# EAGLE board ME461_F28379DPicture (EAGLE 7.7.0), part 1 of 3
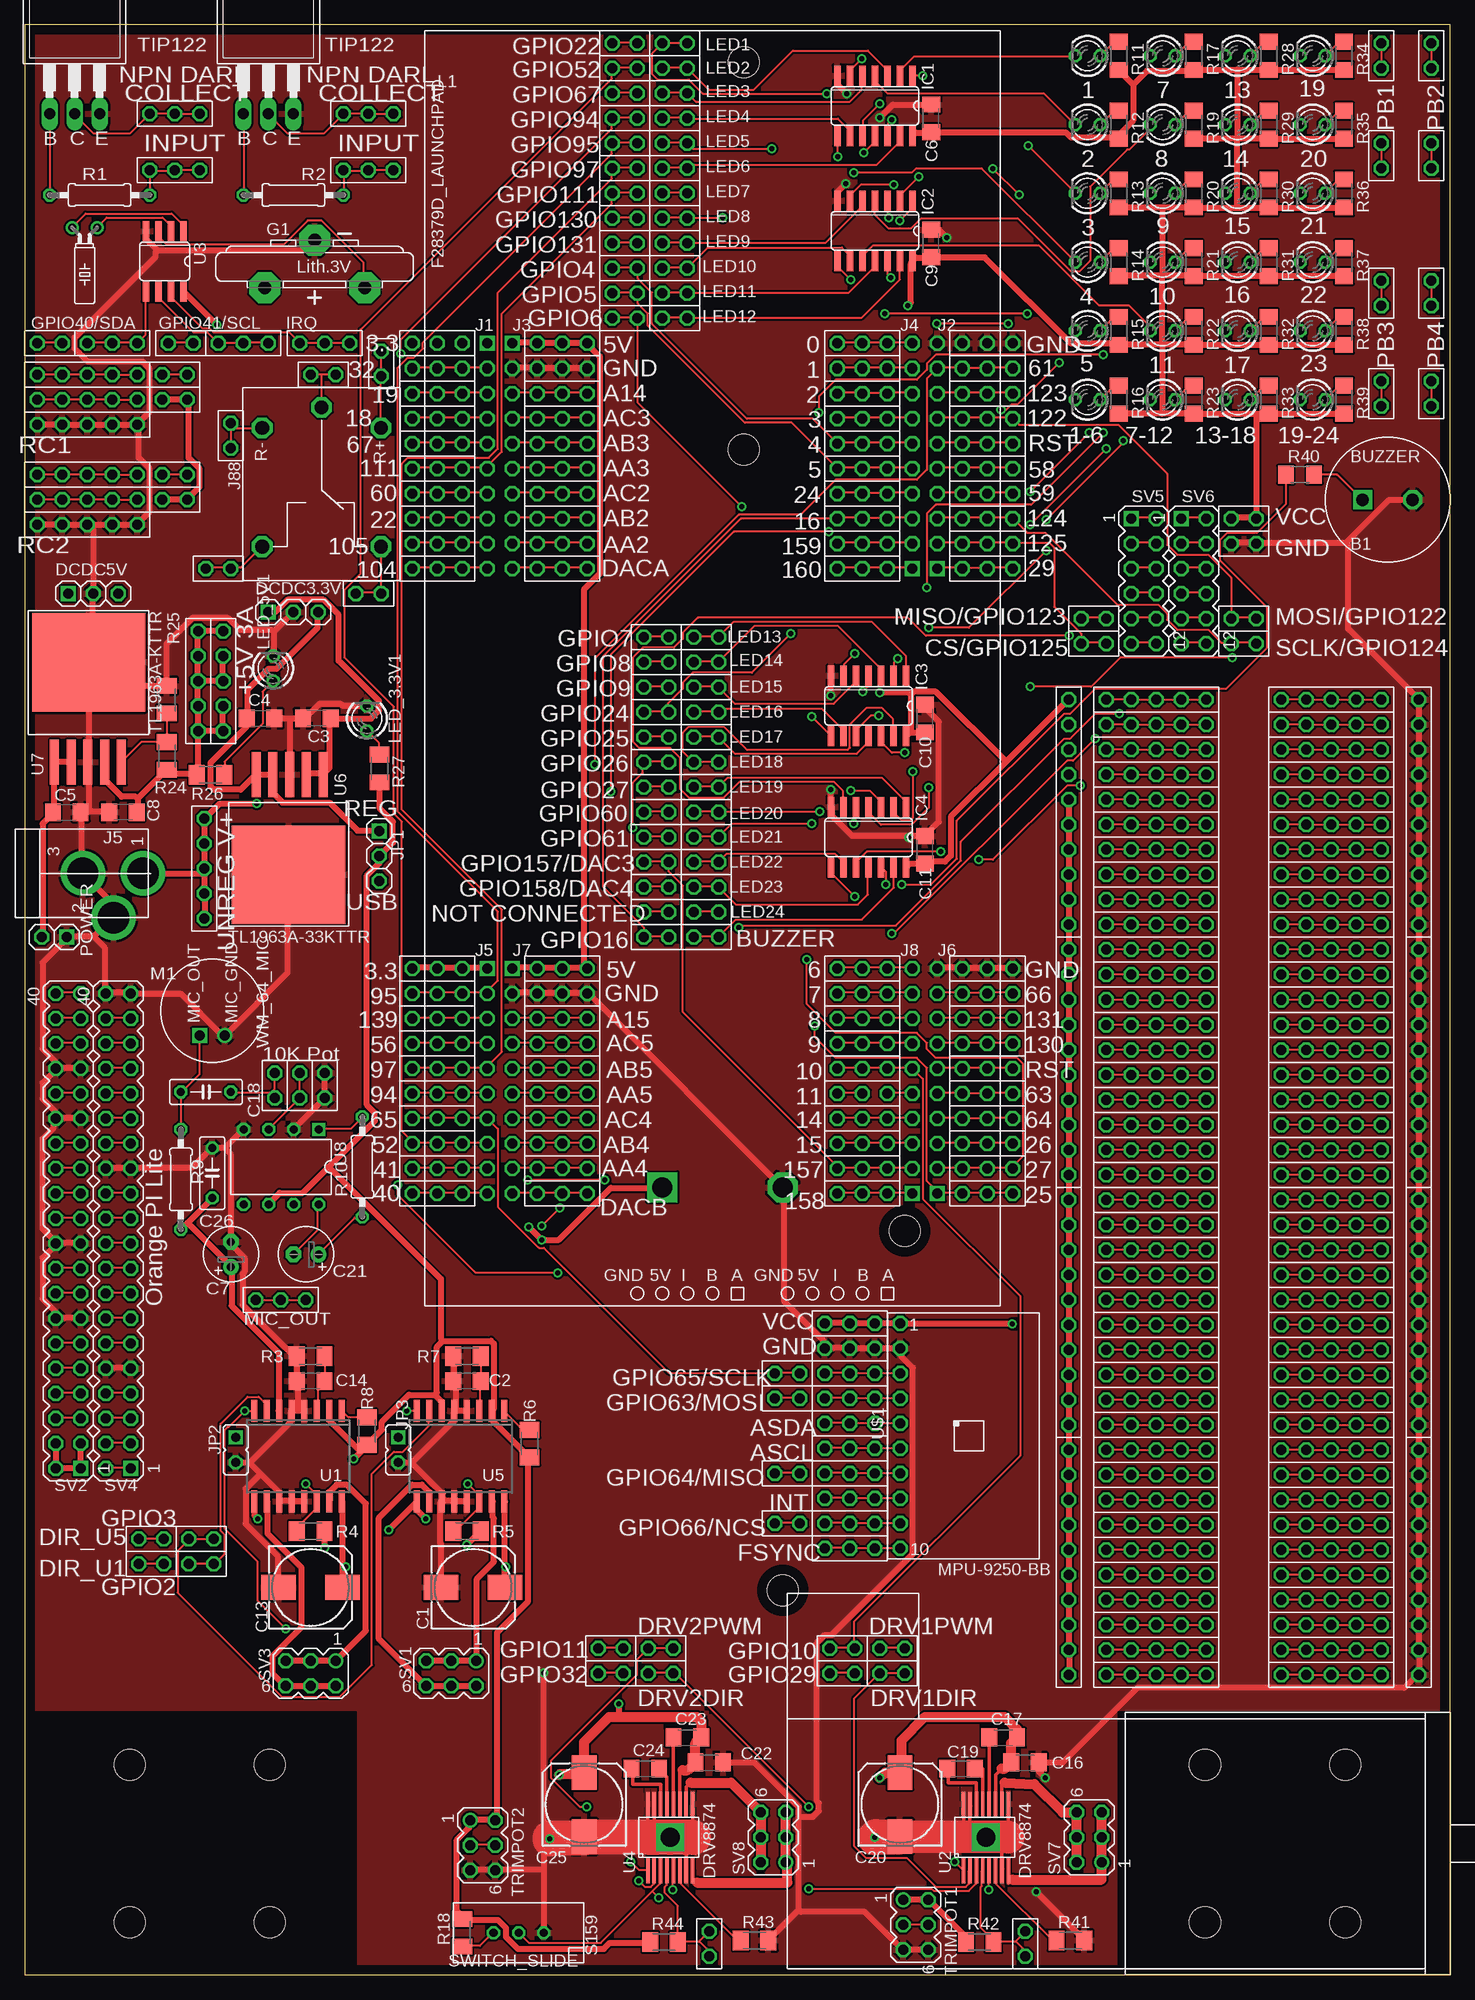
[diagram p0: board, top side]
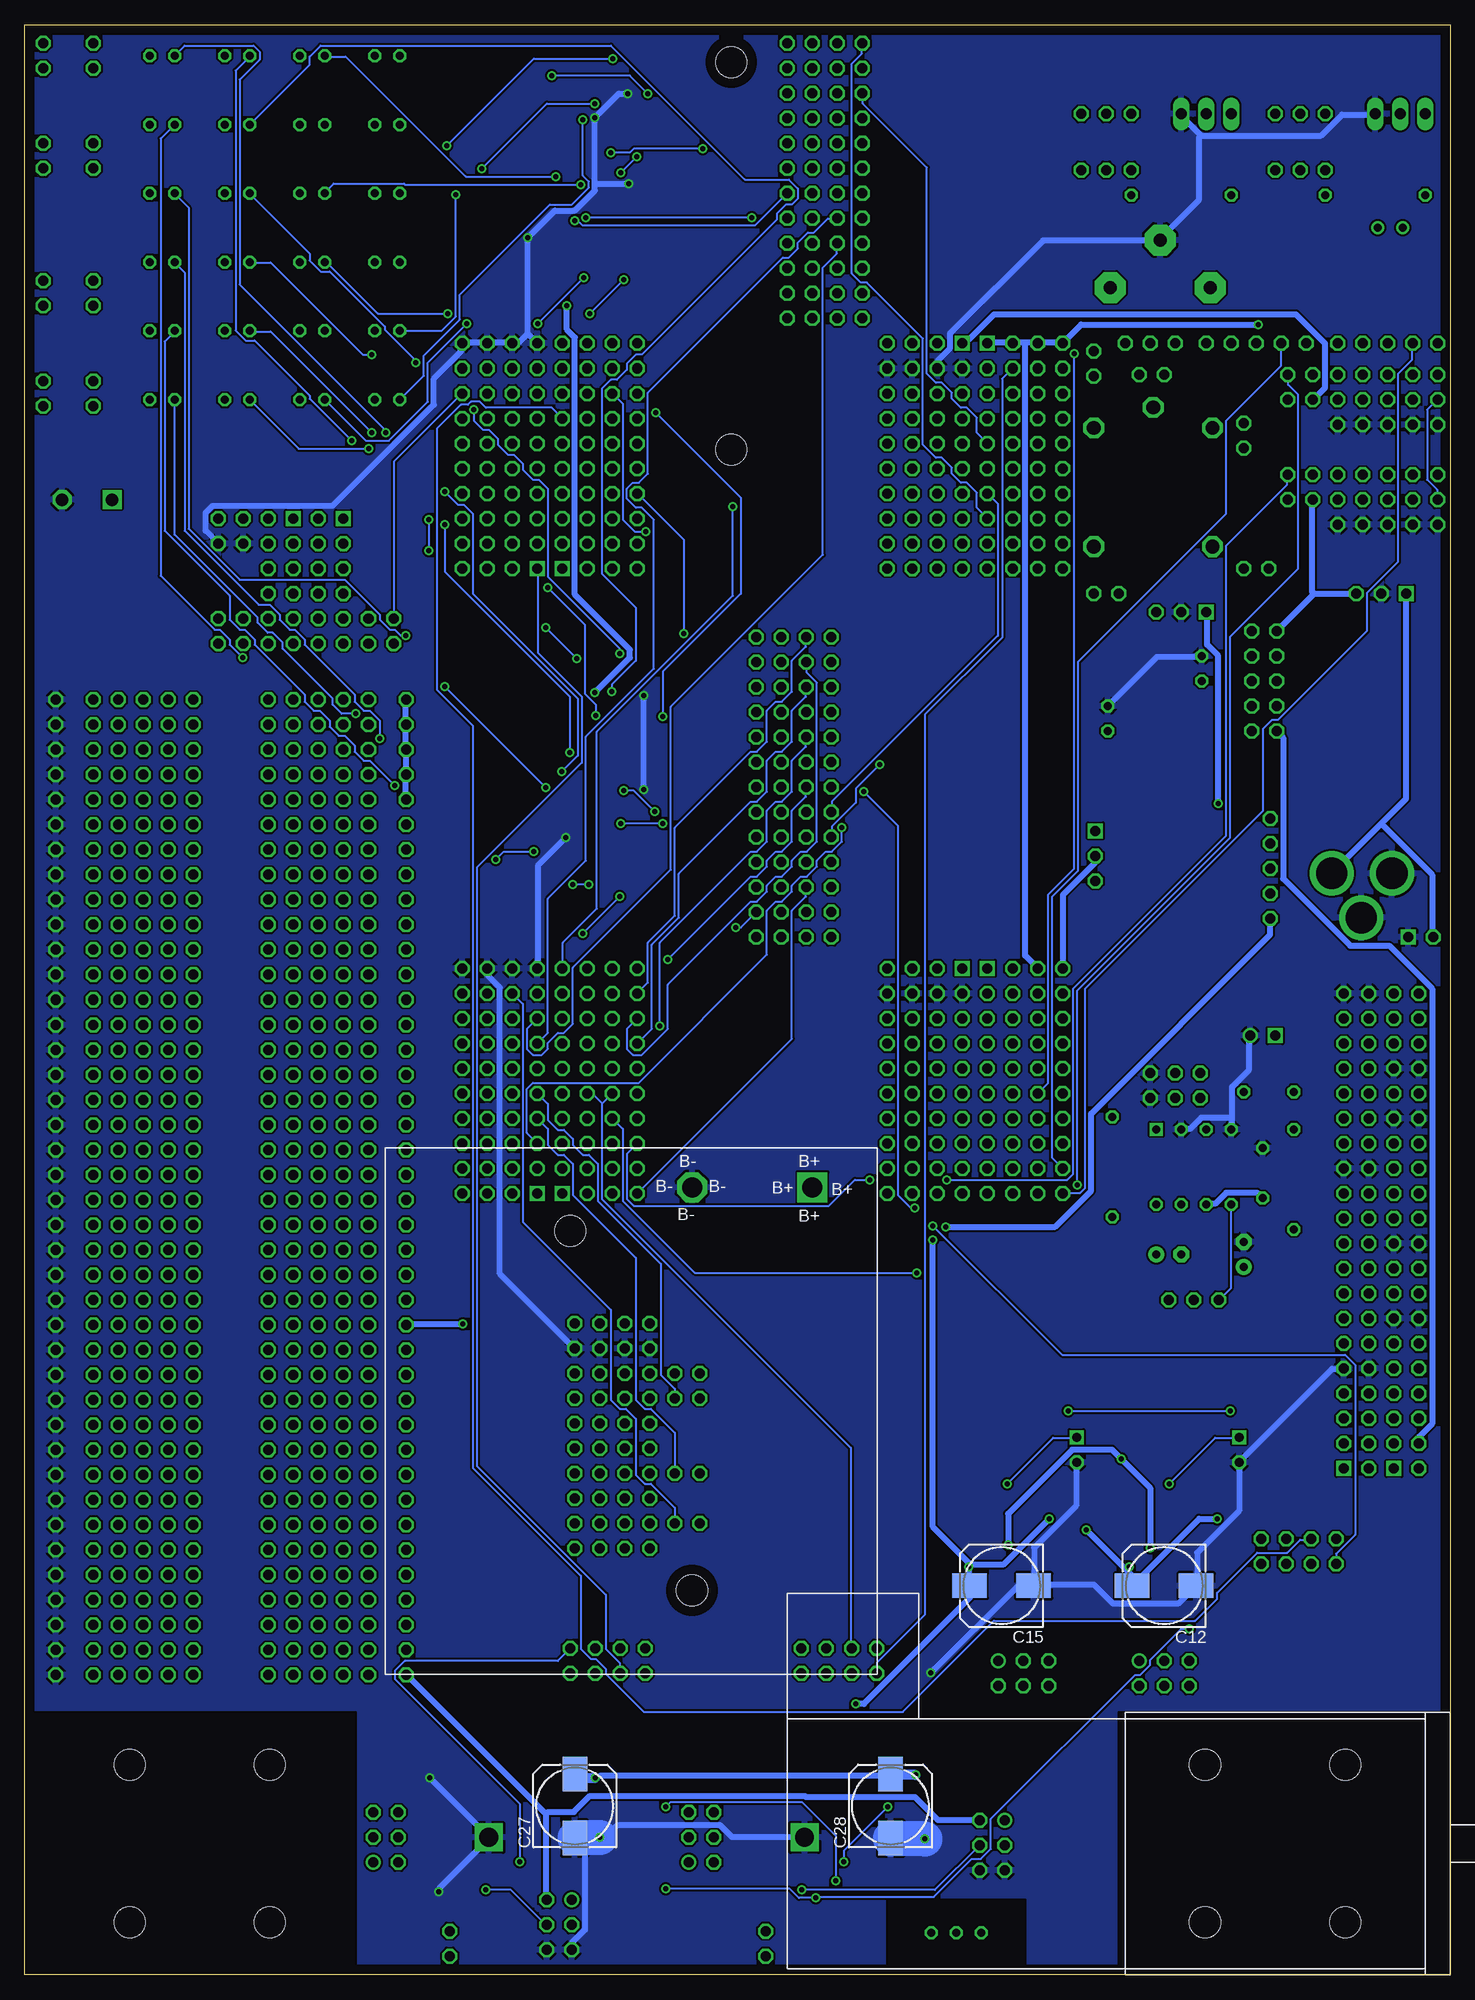
[diagram p1: board, bottom side, seen from below]

Size 144.78 x 198.12 mm. Coordinates in mm from the lower left corner, seen from the top.
Outline: 0,0 144.78,0 144.78,198.12 0,198.12 0,0
Copper layers (1*16): Top 0.035mm / dielectric 1.5mm / Bottom 0.035mm
Design rules "default *": minimum track width 7mil, minimum drill 20mil, track to track 8mil, track to pad 8mil, pad to pad 8mil, via to via 8mil, smd to smd 8mil, copper to edge 40mil, drill to drill 8mil, minimum pad ring 10mil, minimum via ring 8mil, stop-mask expansion 4mil, vias tented up to drill 20mil, thermal gap 10mil
Net classes: 0 default: width 0.203 mm, drill 0.508 mm, clearance 0.203 mm; 1 supply: width 0.61 mm, drill 0.508 mm, clearance 0.203 mm
tRestrict: area 0,0 to 33.7,26.7; area 111.1,0 to 144.8,26.7
bRestrict: area 43.2,0 to 57.1,7.6; area 111.1,0 to 144.8,26.7; area 0,0 to 33.7,26.7

## Footprints (pad centres in the part's own frame; a part is rotated, then mirrored left to right if it is on the bottom)
BUZZER = drill 1.27 square: P$1 -2.54,0 | drill 1.27 octagon: P$2 2.54,0
BATTERY_4AA_HOLDER = drill 2.032 square: P$1 0,0 | drill 2.032 octagon: P$2 12.224,0 | hole 3.175: 12.224,40.958; 24.606,4.445
153CLV-0810 = smd 3.5 x 2.5: + 3.25,0; - -3.25,0
C1206 = smd 1.6 x 1.8: 1 -1.4,0; 2 1.4,0
E2,5-6 = drill 0.813 pad 1.6: + -1.27,0 | drill 0.813 pad 1.6 octagon: - 1.27,0
C050-025X075 = drill 0.813 octagon: 1 -2.54,0; 2 2.54,0
1X03 = drill 1.016 square: 1 -2.54,0 | drill 1.016 octagon: 2 0,0; 3 2.54,0
CR2032V = drill 1.321 pad 3.15 octagon: + -2.54,-5.08; +@1 -2.54,5.08; - 2.286,0
SO14 = smd 0.66 x 2.032: 1 -3.81,-3.073; 2 -2.54,-3.073; 3 -1.27,-3.073; 4 0,-3.073; 5 1.27,-3.073; 6 2.54,-3.073; 7 3.81,-3.073; 8 3.81,3.073; 9 2.54,3.073; 10 1.27,3.073; 11 0,3.073; 12 -1.27,3.073; 13 -2.54,3.073; 14 -3.81,3.073
STRIP3 = drill 1.016 octagon: P$1 0,0; P$2 2.54,0; P$3 5.08,0
JACK-PMS = drill 3.175 pad 4.5: 1 -0.5,-3.31; 2 -5,-0.31; 3 -0.5,2.809
STRIP2 = drill 1.016 octagon: P$1 0,0; P$2 2.54,0
RELAY_JQC-3F_5V = drill 1.397 octagon: P$1 0,0; P$2 2.064,6.032; P$3 14.129,6.032; P$4 14.129,-6.032; P$5 2.064,-6.032
JP1 = drill 0.914 square: 1 0,-1.27 | drill 0.914 octagon: 2 0,1.27
F28379D_LAUNCHPAD = drill 1.016 square: P$1 -24.13,33.02; P$11 21.59,10.16; P$21 -21.59,33.02; P$31 19.05,10.16; P$41 -24.13,-30.48; P$51 21.59,-53.34; P$61 -21.59,-30.48; P$71 19.05,-53.34 | drill 1.016 octagon: P$2 -24.13,30.48; P$3 -24.13,27.94; P$4 -24.13,25.4; P$5 -24.13,22.86; P$6 -24.13,20.32; P$7 -24.13,17.78; P$8 -24.13,15.24; P$9 -24.13,12.7; P$10 -24.13,10.16; P$12 21.59,12.7; P$13 21.59,15.24; P$14 21.59,17.78; P$15 21.59,20.32; P$16 21.59,22.86; P$17 21.59,25.4; P$18 21.59,27.94; P$19 21.59,30.48; P$20 21.59,33.02; P$22 -21.59,30.48; P$23 -21.59,27.94; P$24 -21.59,25.4; P$25 -21.59,22.86; P$26 -21.59,20.32; P$27 -21.59,17.78; P$28 -21.59,15.24; P$29 -21.59,12.7; P$30 -21.59,10.16; P$32 19.05,12.7; P$33 19.05,15.24; P$34 19.05,17.78; P$35 19.05,20.32; P$36 19.05,22.86; P$37 19.05,25.4; P$38 19.05,27.94; P$39 19.05,30.48; P$40 19.05,33.02; P$42 -24.13,-33.02; P$43 -24.13,-35.56; P$44 -24.13,-38.1; P$45 -24.13,-40.64; P$46 -24.13,-43.18; P$47 -24.13,-45.72; P$48 -24.13,-48.26; P$49 -24.13,-50.8; P$50 -24.13,-53.34; P$52 21.59,-50.8; P$53 21.59,-48.26; P$54 21.59,-45.72; P$55 21.59,-43.18; P$56 21.59,-40.64; P$57 21.59,-38.1; P$58 21.59,-35.56; P$59 21.59,-33.02; P$60 21.59,-30.48; P$62 -21.59,-33.02; P$63 -21.59,-35.56; P$64 -21.59,-38.1; P$65 -21.59,-40.64; P$66 -21.59,-43.18; P$67 -21.59,-45.72; P$68 -21.59,-48.26; P$69 -21.59,-50.8; P$70 -21.59,-53.34; P$72 19.05,-50.8; P$73 19.05,-48.26; P$74 19.05,-45.72; P$75 19.05,-43.18; P$76 19.05,-40.64; P$77 19.05,-38.1; P$78 19.05,-35.56; P$79 19.05,-33.02; P$80 19.05,-30.48
LED3MM = drill 0.813 octagon: A -1.27,0; K 1.27,0
WM_64_MIC = drill 1.016 square: P$1 0,0 | drill 1.016: P$2 2.54,0
1X02 = drill 1.016 square: 1 -1.27,0 | drill 1.016 octagon: 2 1.27,0
TC26H = drill 0.813: 1 -1.27,0; 2 1.27,0
0207/10 = drill 0.813 octagon: 1 -5.08,0; 2 5.08,0
M1206 = smd 1.6 x 2: 1 -1.4,0; 2 1.4,0
R1206 = smd 1.6 x 1.803: 1 -1.422,0; 2 1.422,0
STRIP5 = drill 1.016 octagon: P$1 0,0; P$2 2.54,0; P$3 5.08,0; P$4 7.62,0; P$5 10.16,0
STRIP10 = drill 1.016 octagon: P$1 0,0; P$2 2.54,0; P$3 5.08,0; P$4 7.62,0; P$5 10.16,0; P$6 12.7,0; P$7 15.24,0; P$8 17.78,0; P$9 20.32,0; P$10 22.86,0
SWITCH_SLIDE = drill 0.813 octagon: P$1 0,-5.08; P$2 0,-2.54; P$3 0,0
MA03-2 = drill 1.016: 1 -2.54,-1.27 | drill 1.016 octagon: 2 -2.54,1.27; 3 0,-1.27; 4 0,1.27; 5 2.54,-1.27; 6 2.54,1.27
MA20-2 = drill 1.016 square: 1 -24.13,-1.27 | drill 1.016 octagon: 2 -24.13,1.27; 3 -21.59,-1.27; 4 -21.59,1.27; 5 -19.05,-1.27; 6 -19.05,1.27; 7 -16.51,-1.27; 8 -16.51,1.27; 9 -13.97,-1.27; 10 -13.97,1.27; 11 -11.43,-1.27; 12 -11.43,1.27; 13 -8.89,-1.27; 14 -8.89,1.27; 15 -6.35,-1.27; 16 -6.35,1.27; 17 -3.81,-1.27; 18 -3.81,1.27; 19 -1.27,-1.27; 20 -1.27,1.27; 21 1.27,-1.27; 22 1.27,1.27; 23 3.81,-1.27; 24 3.81,1.27; 25 6.35,-1.27; 26 6.35,1.27; 27 8.89,-1.27; 28 8.89,1.27; 29 11.43,-1.27; 30 11.43,1.27; 31 13.97,-1.27; 32 13.97,1.27; 33 16.51,-1.27; 34 16.51,1.27; 35 19.05,-1.27; 36 19.05,1.27; 37 21.59,-1.27; 38 21.59,1.27; 39 24.13,-1.27; 40 24.13,1.27
MA06-2 = drill 1.016 square: 1 -6.35,-1.27 | drill 1.016 octagon: 2 -6.35,1.27; 3 -3.81,-1.27; 4 -3.81,1.27; 5 -1.27,-1.27; 6 -1.27,1.27; 7 1.27,-1.27; 8 1.27,1.27; 9 3.81,-1.27; 10 3.81,1.27; 11 6.35,-1.27; 12 6.35,1.27
TO220 = drill 1.118 long: 1 -2.54,-6.35; 2 0,-6.35; 3 2.54,-6.35
SO16W = smd 0.6 x 2.2: 1 -4.445,-4.6; 2 -3.175,-4.6; 3 -1.905,-4.6; 4 -0.635,-4.6; 5 0.635,-4.6; 6 1.905,-4.6; 7 3.175,-4.6; 8 4.445,-4.6; 9 4.445,4.6; 10 3.175,4.6; 11 1.905,4.6; 12 0.635,4.6; 13 -0.635,4.6; 14 -1.905,4.6; 15 -3.175,4.6; 16 -4.445,4.6
HTSSOP16 = smd 2.5 x 0.35: P$1 -3.4,2.275; P$2 -3.4,1.625; P$3 -3.4,0.975; P$4 -3.4,0.325; P$5 -3.4,-0.325; P$6 -3.4,-0.975; P$7 -3.4,-1.625; P$8 -3.4,-2.275; P$9 3.4,-2.275; P$10 3.4,-1.625; P$11 3.4,-0.975; P$12 3.4,-0.325; P$13 3.4,0.325; P$14 3.4,0.975; P$15 3.4,1.625; P$16 3.4,2.275 | drill 1.905 pad 2.54 square: P$17 0,0
SO08 = smd 0.66 x 2.032: 1 -1.905,-3.073; 2 -0.635,-3.073; 3 0.635,-3.073; 4 1.905,-3.073; 5 1.905,3.073; 6 0.635,3.073; 7 -0.635,3.073; 8 -1.905,3.073
TL1963AKTTR = smd 0.914 x 4.572: P$1 -3.81,-10.16; P$2 -2.108,-10.16; P$3 -0.406,-10.16; P$4 1.295,-10.16; P$5 2.997,-10.16 | smd 11.5 x 10: P$6 -0.3,0
DIL08 = drill 0.813 square: 1 -3.81,-3.81 | drill 0.813 octagon: 2 -1.27,-3.81; 3 1.27,-3.81; 4 3.81,-3.81; 5 3.81,3.81; 6 1.27,3.81; 7 -1.27,3.81; 8 -3.81,3.81
MPU-9250-BB = drill 1.016 octagon: 1 -11.434,-6.96; 2 -8.894,-6.96; 3 -6.354,-6.96; 4 -3.814,-6.96; 5 -1.274,-6.96; 6 1.266,-6.96; 7 3.806,-6.96; 8 6.346,-6.96; 9 8.886,-6.96; 10 11.426,-6.96
GEARMOTOR_MOUNT = hole 3.175: 7.112,8.001; -7.112,8.001; -7.112,-8.001; 7.112,-8.001
CASTERWHEEL = hole 3.175: 19.685,0; -19.685,0

## Placement (x,y rotation side)
B1  BUZZER  [BUZZER]  138.43,149.86 0 top
B2  BATTERY_4AA_HOLDER  [BATTERY_4AA_HOLDER]  64.77,80.01 180 bottom
C1  47uF  [153CLV-0810]  45.56,39.36 0 top
C2  680pF  [C1206]  44.92,60.32 180 top
C3  10 uF  [C1206]  29.68,127.64 180 top
C4  10 uF  [C1206]  23.96,127.64 0 top
C5  10 uF  [C1206]  4.28,118.12 0 top
C6  0.1uf  [C1206]  92.08,188.59 90 top
C7  10uF  [E2,5-6]  20.96,73.19 90 top
C8  10 uF  [C1206]  9.99,118.12 180 top
C9  0.1uf  [C1206]  92.08,175.9 90 top
C10  0.1uf  [C1206]  91.44,127.64 90 top
C11  0.1uf  [C1206]  91.44,114.3 90 top
C12  47uF  [153CLV-0810]  29.05,39.53 180 bottom
C13  47uF  [153CLV-0810]  29.05,39.36 0 top
C14  680pF  [C1206]  29.05,60.32 180 top
C15  47uF  [153CLV-0810]  45.56,39.53 180 bottom
C16  0.1uF  [C1206]  101.6,21.59 0 top
C17  0.1uF  [C1206]  99.38,24.13 0 top
C18  0.22uF  [C050-025X075]  18.42,89.7 0 top
C19  22nF  [C1206]  95.09,20.95 0 top
C20  47uF  [153CLV-0810]  88.9,17.3 90 top
C21  10uF  [E2,5-6]  28.58,73.19 180 top
C22  0.1uF  [C1206]  69.53,21.59 0 top
C23  0.1uF  [C1206]  67.31,24.13 0 top
C24  22nF  [C1206]  63.02,20.95 0 top
C25  47uF  [153CLV-0810]  56.83,17.3 90 top
C26  0.1uF  [C050-025X075]  19.06,81.45 90 top
C27  47uF  [153CLV-0810]  88.9,17.14 90 bottom
C28  47uF  [153CLV-0810]  56.83,17.14 90 bottom
DCDC3.3V  [1X03]  27.3,138.43 0 top
DCDC5V  [1X03]  6.99,140.34 0 top
G1  CR2032V  [CR2032V]  29.46,173.95 90 top
IC1  7404D  [SO14]  86.36,189.87 180 top
IC2  7404D  [SO14]  86.36,177.16 180 top
IC3  7404D  [SO14]  85.72,128.91 180 top
IC4  7404D  [SO14]  85.72,115.57 180 top
J1  STRIP3  [STRIP3]  27.94,165.74 0 top
J2  STRIP3  [STRIP3]  19.68,165.74 0 top
J3  STRIP3  [STRIP3]  6.35,165.74 0 top
J4  STRIP3  [STRIP3]  12.69,189.06 0 top
J5  [JACK-PMS]  8.72,112.4 90 top
J6  STRIP3  [STRIP3]  12.69,183.35 0 top
J7  STRIP2  [STRIP2]  25.41,91.61 270 top
J8  STRIP2  [STRIP2]  27.95,91.61 270 top
J9  STRIP2  [STRIP2]  30.49,91.61 270 top
J10  STRIP3  [STRIP3]  39.37,165.74 0 top
J11  STRIP2  [STRIP2]  64.77,178.44 0 top
J12  STRIP2  [STRIP2]  64.77,175.9 0 top
J13  STRIP2  [STRIP2]  64.77,173.35 0 top
J14  STRIP3  [STRIP3]  39.37,163.19 0 top
J15  STRIP3  [STRIP3]  39.37,160.66 0 top
J16  STRIP3  [STRIP3]  39.37,158.12 0 top
J17  STRIP3  [STRIP3]  39.37,155.57 0 top
J18  STRIP3  [STRIP3]  39.37,153.03 0 top
J19  STRIP3  [STRIP3]  39.37,150.5 0 top
J20  STRIP3  [STRIP3]  39.37,147.96 0 top
J21  STRIP3  [STRIP3]  39.37,145.41 0 top
J22  STRIP2  [STRIP2]  64.77,170.81 0 top
J23  STRIP3  [STRIP3]  32.38,189.06 0 top
J24  STRIP3  [STRIP3]  32.38,183.35 0 top
J25  STRIP2  [STRIP2]  64.77,168.28 0 top
J26  STRIP2  [STRIP2]  64.77,180.97 0 top
J27  STRIP2  [STRIP2]  67.94,133.35 0 top
J28  STRIP3  [STRIP3]  39.37,142.88 0 top
J29  STRIP3  [STRIP3]  95.25,142.88 0 top
J30  STRIP3  [STRIP3]  95.25,145.41 0 top
J31  STRIP3  [STRIP3]  95.25,147.96 0 top
J32  STRIP3  [STRIP3]  95.25,150.5 0 top
J33  STRIP3  [STRIP3]  95.25,153.03 0 top
J34  STRIP2  [STRIP2]  67.94,130.81 0 top
J49  STRIP3  [STRIP3]  28.57,68.58 180 top
J62  STRIP2  [STRIP2]  67.94,107.95 0 top
J63  STRIP2  [STRIP2]  62.87,107.95 0 top
J64  STRIP2  [STRIP2]  122.56,145.41 0 top
J65  STRIP2  [STRIP2]  122.56,147.96 0 top
J66  STRIP2  [STRIP2]  122.56,137.79 0 top
J67  STRIP2  [STRIP2]  107.31,137.79 0 top
J68  STRIP2  [STRIP2]  122.56,135.25 0 top
J69  STRIP2  [STRIP2]  107.31,135.25 0 top
J70  STRIP2  [STRIP2]  137.79,183.51 90 top
J71  STRIP2  [STRIP2]  137.79,193.68 90 top
J72  STRIP2  [STRIP2]  142.88,183.51 90 top
J73  STRIP2  [STRIP2]  142.88,193.68 90 top
J74  STRIP2  [STRIP2]  137.79,159.38 90 top
J75  STRIP2  [STRIP2]  137.79,169.54 90 top
J76  STRIP2  [STRIP2]  142.88,159.38 90 top
J77  STRIP2  [STRIP2]  142.88,169.54 90 top
J78  STRIP2  [STRIP2]  101.6,4.45 270 top
J79  STRIP2  [STRIP2]  86.84,33.18 0 top
J80  STRIP2  [STRIP2]  86.84,30.64 0 top
J81  STRIP2  [STRIP2]  69.53,4.45 270 top
J82  STRIP2  [STRIP2]  63.34,33.18 0 top
J83  STRIP2  [STRIP2]  63.34,30.64 0 top
J84  STRIP2  [STRIP2]  81.76,33.18 0 top
J85  STRIP2  [STRIP2]  81.76,30.64 0 top
J86  STRIP2  [STRIP2]  58.26,33.18 0 top
J87  STRIP2  [STRIP2]  58.26,30.64 0 top
J88  RELAY_JQC-3F_5V  [RELAY_JQC-3F_5V]  30.16,159.23 270 top
J89  STRIP2  [STRIP2]  36.2,164.94 270 top
J90  STRIP2  [STRIP2]  20.95,157.64 270 top
J91  STRIP2  [STRIP2]  29.05,162.56 0 top
J92  STRIP2  [STRIP2]  33.66,140.34 0 top
J93  STRIP2  [STRIP2]  18.41,142.88 0 top
J98  STRIP3  [STRIP3]  95.25,155.57 0 top
J99  STRIP3  [STRIP3]  95.25,158.12 0 top
J100  STRIP3  [STRIP3]  95.25,160.66 0 top
J101  STRIP3  [STRIP3]  95.25,163.19 0 top
J102  STRIP3  [STRIP3]  95.25,165.74 0 top
J103  STRIP3  [STRIP3]  52.07,165.74 0 top
J104  STRIP3  [STRIP3]  52.07,163.19 0 top
J105  STRIP3  [STRIP3]  52.07,160.66 0 top
J106  STRIP3  [STRIP3]  52.07,158.12 0 top
J107  STRIP3  [STRIP3]  52.07,155.57 0 top
J108  STRIP3  [STRIP3]  52.07,153.03 0 top
J109  STRIP3  [STRIP3]  52.07,150.5 0 top
J110  STRIP3  [STRIP3]  52.07,147.96 0 top
J111  STRIP3  [STRIP3]  52.07,145.41 0 top
J112  STRIP3  [STRIP3]  52.07,142.88 0 top
J113  STRIP3  [STRIP3]  82.55,142.88 0 top
J114  STRIP3  [STRIP3]  82.55,145.41 0 top
J115  STRIP3  [STRIP3]  82.55,147.96 0 top
J116  STRIP3  [STRIP3]  82.55,150.5 0 top
J117  STRIP3  [STRIP3]  82.55,153.03 0 top
J118  STRIP3  [STRIP3]  82.55,155.57 0 top
J119  STRIP3  [STRIP3]  82.55,158.12 0 top
J120  STRIP3  [STRIP3]  82.55,160.66 0 top
J121  STRIP3  [STRIP3]  82.55,163.19 0 top
J122  STRIP3  [STRIP3]  82.55,165.74 0 top
J123  STRIP3  [STRIP3]  81.28,66.2 0 top
J124  STRIP3  [STRIP3]  81.28,63.66 0 top
J125  STRIP3  [STRIP3]  81.28,61.12 0 top
J126  STRIP3  [STRIP3]  81.28,58.58 0 top
J127  STRIP3  [STRIP3]  81.28,56.04 0 top
J128  STRIP3  [STRIP3]  81.28,53.5 0 top
J129  STRIP3  [STRIP3]  81.28,50.96 0 top
J130  STRIP3  [STRIP3]  81.28,48.42 0 top
J131  STRIP3  [STRIP3]  81.28,45.88 0 top
J132  STRIP3  [STRIP3]  81.28,43.34 0 top
J133  STRIP3  [STRIP3]  82.55,102.23 0 top
J134  STRIP3  [STRIP3]  82.55,99.69 0 top
J135  STRIP3  [STRIP3]  82.55,97.16 0 top
J136  STRIP3  [STRIP3]  82.55,94.61 0 top
J137  STRIP3  [STRIP3]  82.55,92.08 0 top
J138  STRIP3  [STRIP3]  82.55,89.53 0 top
J139  STRIP3  [STRIP3]  82.55,87 0 top
J140  STRIP3  [STRIP3]  82.55,84.45 0 top
J141  STRIP3  [STRIP3]  82.55,81.92 0 top
J142  STRIP3  [STRIP3]  82.55,79.38 0 top
J143  STRIP3  [STRIP3]  52.07,79.38 0 top
J144  STRIP3  [STRIP3]  52.07,81.92 0 top
J145  STRIP3  [STRIP3]  52.07,84.45 0 top
J146  STRIP3  [STRIP3]  52.07,87 0 top
J147  STRIP3  [STRIP3]  52.07,89.53 0 top
J148  STRIP3  [STRIP3]  52.07,92.08 0 top
J149  STRIP3  [STRIP3]  52.07,94.61 0 top
J150  STRIP3  [STRIP3]  52.07,97.16 0 top
J151  STRIP3  [STRIP3]  52.07,99.69 0 top
J152  STRIP3  [STRIP3]  52.07,102.23 0 top
J153  STRIP3  [STRIP3]  95.25,102.23 0 top
J154  STRIP3  [STRIP3]  95.25,99.69 0 top
J155  STRIP3  [STRIP3]  95.25,97.16 0 top
J156  STRIP3  [STRIP3]  95.25,94.61 0 top
J157  STRIP3  [STRIP3]  95.25,92.08 0 top
J158  STRIP3  [STRIP3]  95.25,89.53 0 top
J159  STRIP3  [STRIP3]  95.25,87 0 top
J160  STRIP3  [STRIP3]  95.25,84.45 0 top
J161  STRIP3  [STRIP3]  95.25,81.92 0 top
J162  STRIP3  [STRIP3]  95.25,79.38 0 top
J163  STRIP3  [STRIP3]  39.37,79.38 0 top
J164  STRIP3  [STRIP3]  39.37,81.92 0 top
J165  STRIP3  [STRIP3]  39.37,84.45 0 top
J166  STRIP3  [STRIP3]  39.37,87 0 top
J167  STRIP3  [STRIP3]  39.37,89.53 0 top
J168  STRIP3  [STRIP3]  39.37,92.08 0 top
J169  STRIP3  [STRIP3]  39.37,94.61 0 top
J170  STRIP3  [STRIP3]  39.37,97.16 0 top
J176  STRIP3  [STRIP3]  39.37,99.69 0 top
J177  STRIP3  [STRIP3]  39.37,102.23 0 top
J178  STRIP2  [STRIP2]  64.77,196.22 0 top
J179  STRIP2  [STRIP2]  64.77,193.68 0 top
J180  STRIP2  [STRIP2]  64.77,191.13 0 top
J182  STRIP2  [STRIP2]  64.77,188.59 0 top
J183  STRIP2  [STRIP2]  64.77,186.06 0 top
J184  STRIP2  [STRIP2]  64.77,183.51 0 top
J186  STRIP2  [STRIP2]  67.94,128.27 0 top
J187  STRIP2  [STRIP2]  67.94,125.73 0 top
J188  STRIP2  [STRIP2]  67.94,123.19 0 top
J189  STRIP2  [STRIP2]  67.94,135.89 0 top
J190  STRIP2  [STRIP2]  67.94,118.11 0 top
J191  STRIP2  [STRIP2]  67.94,115.57 0 top
J192  STRIP2  [STRIP2]  67.94,113.03 0 top
J193  STRIP2  [STRIP2]  67.94,110.49 0 top
J194  STRIP2  [STRIP2]  67.94,105.41 0 top
J195  STRIP2  [STRIP2]  67.94,120.65 0 top
J196  STRIP2  [STRIP2]  16.67,41.75 0 top
J197  STRIP2  [STRIP2]  16.67,44.29 0 top
J198  STRIP2  [STRIP2]  11.59,41.75 0 top
J199  STRIP2  [STRIP2]  11.59,44.29 0 top
J200  STRIP2  [STRIP2]  13.97,160.02 0 top
J201  STRIP2  [STRIP2]  13.97,162.56 0 top
J202  STRIP2  [STRIP2]  13.97,152.4 0 top
J203  STRIP2  [STRIP2]  13.97,149.86 0 top
J204  STRIP2  [STRIP2]  76.2,58.58 0 top
J205  STRIP2  [STRIP2]  76.2,50.96 0 top
J206  STRIP2  [STRIP2]  76.2,61.12 0 top
J207  STRIP2  [STRIP2]  76.2,45.88 0 top
J208  STRIP2  [STRIP2]  1.27,165.74 0 top
J209  STRIP2  [STRIP2]  14.61,165.74 0 top
J210  STRIP2  [STRIP2]  59.69,196.22 0 top
J211  STRIP2  [STRIP2]  59.69,193.68 0 top
J232  STRIP2  [STRIP2]  59.69,191.13 0 top
J233  STRIP2  [STRIP2]  59.69,188.59 0 top
J234  STRIP2  [STRIP2]  59.69,183.51 0 top
J235  STRIP2  [STRIP2]  59.69,180.97 0 top
J236  STRIP2  [STRIP2]  59.69,178.44 0 top
J237  STRIP2  [STRIP2]  59.69,175.9 0 top
J238  STRIP2  [STRIP2]  59.69,173.35 0 top
J239  STRIP2  [STRIP2]  59.69,170.81 0 top
J240  STRIP2  [STRIP2]  59.69,168.28 0 top
J241  STRIP2  [STRIP2]  59.69,186.06 0 top
J242  STRIP2  [STRIP2]  62.87,135.89 0 top
J243  STRIP2  [STRIP2]  62.87,133.35 0 top
J244  STRIP2  [STRIP2]  62.87,130.81 0 top
J245  STRIP2  [STRIP2]  62.87,128.27 0 top
J246  STRIP2  [STRIP2]  62.87,125.73 0 top
J247  STRIP2  [STRIP2]  62.87,123.19 0 top
J248  STRIP2  [STRIP2]  62.87,120.65 0 top
J249  STRIP2  [STRIP2]  62.87,118.11 0 top
J250  STRIP2  [STRIP2]  62.87,115.57 0 top
J251  STRIP2  [STRIP2]  62.87,105.41 0 top
J252  STRIP2  [STRIP2]  62.87,113.03 0 top
J253  STRIP2  [STRIP2]  62.87,110.49 0 top
JP1  VSEL  [1X03]  36.03,113.67 270 top
JP2  [JP1]  21.43,53.33 180 top
JP3  [JP1]  37.94,53.33 180 top
L1  F28379D_LAUNCHPAD  [F28379D_LAUNCHPAD]  71.12,132.72 0 top
LED1  [LED3MM]  107.95,194.94 180 top
LED2  [LED3MM]  107.95,187.96 180 top
LED3  [LED3MM]  107.95,180.97 180 top
LED4  [LED3MM]  107.95,173.99 180 top
LED5  [LED3MM]  107.95,167 180 top
LED6  [LED3MM]  107.95,160.02 180 top
LED7  [LED3MM]  115.57,194.94 180 top
LED8  [LED3MM]  115.57,187.96 180 top
LED9  [LED3MM]  115.57,180.97 180 top
LED10  [LED3MM]  115.57,173.99 180 top
LED11  [LED3MM]  115.57,167 180 top
LED12  [LED3MM]  115.57,160.02 180 top
LED13  [LED3MM]  123.19,194.94 180 top
LED14  [LED3MM]  123.19,187.96 180 top
LED15  [LED3MM]  123.19,180.97 180 top
LED16  [LED3MM]  123.19,173.99 180 top
LED17  [LED3MM]  123.19,167 180 top
LED18  [LED3MM]  123.19,160.02 180 top
LED19  [LED3MM]  130.81,194.94 180 top
LED20  [LED3MM]  130.81,187.96 180 top
LED21  [LED3MM]  130.81,180.97 180 top
LED22  [LED3MM]  130.81,173.99 180 top
LED23  [LED3MM]  130.81,167 180 top
LED24  [LED3MM]  130.81,160.02 180 top
LED_3.3V1  [LED3MM]  34.76,127.64 90 top
LED_5V1  [LED3MM]  25.23,132.72 90 top
M1  WM_64_MIC  [WM_64_MIC]  17.79,95.42 0 top
POWER  [1X02]  3.01,105.42 180 top
Q1  32.768KHz  [TC26H]  6.09,177.51 180 top
R1  R_B  [0207/10]  7.61,180.81 180 top
R2  R_B  [0207/10]  27.3,180.81 180 top
R3  24.9K  [M1206]  29.05,62.86 0 top
R4  2.2K  [M1206]  29.05,45.08 0 top
R5  2.2K  [M1206]  44.92,45.08 0 top
R6  2.2K  [M1206]  51.27,53.97 270 top
R7  24.9K  [M1206]  44.92,62.86 0 top
R8  2.2K  [M1206]  34.76,55.24 270 top
R9  2.2K  [0207/10]  15.88,80.81 90 top
R10  1.2K  [0207/10]  34.3,82.08 90 top
R11  [R1206]  111.12,194.94 270 top
R12  [R1206]  111.12,187.96 270 top
R13  [R1206]  111.12,180.97 270 top
R14  [R1206]  111.12,173.99 270 top
R15  [R1206]  111.12,167 270 top
R16  [R1206]  111.12,160.02 270 top
R17  [R1206]  118.75,194.94 270 top
R18  2.2K  [M1206]  44.44,4.28 90 top
R19  [R1206]  118.75,187.96 270 top
R20  [R1206]  118.75,180.97 270 top
R21  [R1206]  118.75,173.99 270 top
R22  [R1206]  118.75,167 270 top
R23  [R1206]  118.75,160.02 270 top
R24  1500  [M1206]  14.44,123.83 270 top
R25  470  [M1206]  14.44,129.55 270 top
R26  470  [M1206]  18.88,121.93 180 top
R27  220  [M1206]  36.03,122.56 270 top
R28  [R1206]  126.36,194.94 270 top
R29  [R1206]  126.36,187.96 270 top
R30  [R1206]  126.36,180.97 270 top
R31  [R1206]  126.36,173.99 270 top
R32  [R1206]  126.36,167 270 top
R33  [R1206]  126.36,160.02 270 top
R34  [R1206]  133.99,194.94 270 top
R35  [R1206]  133.99,187.96 270 top
R36  [R1206]  133.99,180.97 270 top
R37  [R1206]  133.99,173.99 270 top
R38  [R1206]  133.99,167 270 top
R39  [R1206]  133.99,160.02 270 top
R40  100  [R1206]  129.54,152.4 0 top
R41  1.8K  [M1206]  106.2,3.49 0 top
R42  10K  [M1206]  97,3.33 0 top
R43  1.8K  [M1206]  74.14,3.49 0 top
R44  10K  [M1206]  64.93,3.33 0 top
S17  STRIP5  [STRIP5]  20.15,126.37 90 top
S18  STRIP5  [STRIP5]  17.61,126.37 90 top
S20  STRIP10  [STRIP10]  141.6,30.48 90 top
S24  STRIP10  [STRIP10]  141.6,55.88 90 top
S27  STRIP10  [STRIP10]  141.6,106.68 90 top
S28  STRIP10  [STRIP10]  141.6,81.28 90 top
S42  STRIP10  [STRIP10]  106.05,106.68 90 top
S50  STRIP10  [STRIP10]  106.05,81.28 90 top
S53  STRIP10  [STRIP10]  106.05,30.48 90 top
S58  STRIP10  [STRIP10]  106.05,55.88 90 top
S91  STRIP5  [STRIP5]  109.86,129.54 0 top
S92  STRIP5  [STRIP5]  109.86,127 0 top
S93  STRIP5  [STRIP5]  109.86,124.46 0 top
S94  STRIP5  [STRIP5]  109.86,121.92 0 top
S95  STRIP5  [STRIP5]  109.86,119.38 0 top
S96  STRIP5  [STRIP5]  109.86,116.84 0 top
S97  STRIP5  [STRIP5]  109.86,114.3 0 top
S98  STRIP5  [STRIP5]  109.86,111.76 0 top
S99  STRIP5  [STRIP5]  109.86,109.22 0 top
S101  STRIP5  [STRIP5]  109.86,106.68 0 top
S105  STRIP5  [STRIP5]  109.86,104.14 0 top
S108  STRIP5  [STRIP5]  109.86,101.6 0 top
S129  STRIP5  [STRIP5]  11.43,157.48 180 top
S130  STRIP5  [STRIP5]  11.43,162.56 180 top
S137  STRIP5  [STRIP5]  11.43,147.32 180 top
S138  STRIP5  [STRIP5]  11.43,152.4 180 top
S139  STRIP5  [STRIP5]  11.43,149.86 180 top
S140  STRIP5  [STRIP5]  109.86,99.06 0 top
S141  STRIP5  [STRIP5]  18.25,107.32 90 top
S147  STRIP5  [STRIP5]  11.43,160.02 180 top
S159  SWITCH_SLIDE  [SWITCH_SLIDE]  47.62,4.28 90 top
S160  STRIP5  [STRIP5]  109.86,96.52 0 top
S161  STRIP5  [STRIP5]  109.86,93.98 0 top
S162  STRIP5  [STRIP5]  109.86,91.44 0 top
S163  STRIP5  [STRIP5]  109.86,88.9 0 top
S164  STRIP5  [STRIP5]  109.86,86.36 0 top
S165  STRIP5  [STRIP5]  109.86,83.82 0 top
S166  STRIP5  [STRIP5]  109.86,81.28 0 top
S167  STRIP5  [STRIP5]  109.86,78.74 0 top
S168  STRIP5  [STRIP5]  109.86,76.2 0 top
S169  STRIP5  [STRIP5]  109.86,73.66 0 top
S170  STRIP5  [STRIP5]  109.86,71.12 0 top
S171  STRIP5  [STRIP5]  109.86,68.58 0 top
S172  STRIP5  [STRIP5]  109.86,66.04 0 top
S173  STRIP5  [STRIP5]  109.86,63.5 0 top
S174  STRIP5  [STRIP5]  109.86,60.96 0 top
S175  STRIP5  [STRIP5]  109.86,58.42 0 top
S176  STRIP5  [STRIP5]  109.86,55.88 0 top
S177  STRIP5  [STRIP5]  109.86,53.34 0 top
S178  STRIP5  [STRIP5]  109.86,50.8 0 top
S179  STRIP5  [STRIP5]  109.86,48.26 0 top
S180  STRIP5  [STRIP5]  109.86,45.72 0 top
S181  STRIP5  [STRIP5]  109.86,43.18 0 top
S182  STRIP5  [STRIP5]  109.86,40.64 0 top
S183  STRIP5  [STRIP5]  109.86,38.1 0 top
S184  STRIP5  [STRIP5]  109.86,35.56 0 top
S185  STRIP5  [STRIP5]  109.86,33.02 0 top
S186  STRIP5  [STRIP5]  109.86,30.48 0 top
S187  STRIP5  [STRIP5]  127.64,30.48 0 top
S188  STRIP5  [STRIP5]  127.64,35.56 0 top
S189  STRIP5  [STRIP5]  127.64,33.02 0 top
S190  STRIP5  [STRIP5]  127.64,129.54 0 top
S191  STRIP5  [STRIP5]  127.64,127 0 top
S192  STRIP5  [STRIP5]  127.64,124.46 0 top
S193  STRIP5  [STRIP5]  127.64,121.92 0 top
S194  STRIP5  [STRIP5]  127.64,119.38 0 top
S195  STRIP5  [STRIP5]  127.64,116.84 0 top
S196  STRIP5  [STRIP5]  127.64,114.3 0 top
S197  STRIP5  [STRIP5]  127.64,111.76 0 top
S198  STRIP5  [STRIP5]  127.64,109.22 0 top
S199  STRIP5  [STRIP5]  127.64,106.68 0 top
S200  STRIP5  [STRIP5]  127.64,104.14 0 top
S201  STRIP5  [STRIP5]  127.64,101.6 0 top
S202  STRIP5  [STRIP5]  127.64,99.06 0 top
S203  STRIP5  [STRIP5]  127.64,96.52 0 top
S204  STRIP5  [STRIP5]  127.64,93.98 0 top
S205  STRIP5  [STRIP5]  127.64,91.44 0 top
S206  STRIP5  [STRIP5]  127.64,88.9 0 top
S207  STRIP5  [STRIP5]  127.64,86.36 0 top
S208  STRIP5  [STRIP5]  127.64,83.82 0 top
S209  STRIP5  [STRIP5]  127.64,81.28 0 top
S210  STRIP5  [STRIP5]  127.64,78.74 0 top
S211  STRIP5  [STRIP5]  127.64,76.2 0 top
S212  STRIP5  [STRIP5]  127.64,73.66 0 top
S213  STRIP5  [STRIP5]  127.64,71.12 0 top
S214  STRIP5  [STRIP5]  127.64,68.58 0 top
S215  STRIP5  [STRIP5]  127.64,66.04 0 top
S216  STRIP5  [STRIP5]  127.64,63.5 0 top
S217  STRIP5  [STRIP5]  127.64,60.96 0 top
S218  STRIP5  [STRIP5]  127.64,58.42 0 top
S219  STRIP5  [STRIP5]  127.64,55.88 0 top
S220  STRIP5  [STRIP5]  127.64,53.34 0 top
S221  STRIP5  [STRIP5]  127.64,50.8 0 top
S222  STRIP5  [STRIP5]  127.64,48.26 0 top
S223  STRIP5  [STRIP5]  127.64,45.72 0 top
S224  STRIP5  [STRIP5]  127.64,43.18 0 top
S225  STRIP5  [STRIP5]  127.64,40.64 0 top
S226  STRIP5  [STRIP5]  127.64,38.1 0 top
SV1  [MA03-2]  43.33,30.63 180 top
SV2  [MA20-2]  4.45,75.56 90 top
SV3  [MA03-2]  29.05,30.63 180 top
SV4  [MA20-2]  9.53,75.56 90 top
SV5  [MA06-2]  113.67,141.6 270 top
SV6  [MA06-2]  118.75,141.6 270 top
SV7  [MA03-2]  108.11,13.97 90 top
SV8  [MA03-2]  76.04,13.97 90 top
T1  TIP125  [TO220]  5.07,195.41 0 top
T2  TIP125  [TO220]  24.76,195.41 0 top
TRIMPOT1  [MA03-2]  90.49,5.08 270 top
TRIMPOT2  [MA03-2]  46.51,13.18 270 top
U1  A3953  [SO16W]  27.78,52.7 180 top
U2  DRV8874  [HTSSOP16]  97.63,13.97 90 top
U3  BQ32000  [SO08]  14.22,174.08 180 top
U4  DRV8874  [HTSSOP16]  65.56,13.97 90 top
U5  A3953  [SO16W]  44.29,52.7 180 top
U6  TL1963A-33KTTR  [TL1963AKTTR]  26.5,111.77 180 top
U7  TL1963A-KTTR  [TL1963AKTTR]  6.82,133.36 0 top
U8  LM386  [DIL08]  26.04,82.08 180 top
U$1  MPU-9250-BB  [MPU-9250-BB]  95.89,54.77 270 top
U$2  GEARMOTOR_MOUNT  [GEARMOTOR_MOUNT]  127,13.34 0 top
U$3  GEARMOTOR_MOUNT  [GEARMOTOR_MOUNT]  17.78,13.34 0 bottom
U$4  CASTERWHEEL  [CASTERWHEEL]  73.03,174.62 90 top

## Library data of the parts
B1 B2 J88 L1 U2 U4 U$2-U$4 = SE423EagleLibrary
C1-C28 R1-R44 = rcl
DCDC3.3V DCDC5V JP1 POWER = pinhead
G1 = battery
IC1-IC4 = 74xx-us
J1-J4 J6-J34 J49 J62-J87 J89-J93 J98-J170 J176-J180 J182-J184 J186-J211 J232-J253 = strip
J5 = POWER-IN
JP2 JP3 = jumper
LED1-LED24 LED_3.3V1 LED_5V1 = led
M1 S17 S18 S20 S24 S27 S28 S42 S50 S53 S58 S91-S99 S101 S105 S108 S129 S130 S137-S141 S147 S160-S226 U1 U5 = custom
Q1 = crystal
S159 = switch_slide
SV1-SV8 TRIMPOT1 TRIMPOT2 = con-lstb; OC_FARNELL: unknown; OC_NEWARK: unknown
T1 T2 = keres
U3 = custom6
U6 U7 = custom4
U8 = LM386
U$1 = MPU-9250_Breakoutboard

## Nets
+5V [supply]: C8.1 DCDC5V.3 J103.P$1 J103.P$2 J103.P$3 J152.P$1 J152.P$2 J152.P$3 J200.P$1 J200.P$2 J203.P$1 J203.P$2 L1.P$21 L1.P$61 R24.2 R26.2 S17.P$1 S17.P$2 S17.P$3 S17.P$4 S17.P$5 S18.P$1 S18.P$2 S18.P$3 S18.P$4 S18.P$5 SV2.1 SV2.2 SV2.3 SV2.4 U7.P$4
ADCIN14: J105.P$1 J105.P$2 J105.P$3 L1.P$23
ADCIN15: J150.P$1 J150.P$2 J150.P$3 L1.P$63
ADCINA2: J111.P$1 J111.P$2 J111.P$3 L1.P$29
ADCINA3: J108.P$1 J108.P$2 J108.P$3 L1.P$26
ADCINA4: J144.P$1 J144.P$2 J144.P$3 L1.P$69
ADCINA5: J147.P$1 J147.P$2 J147.P$3 L1.P$66
ADCINB2: J110.P$1 J110.P$2 J110.P$3 L1.P$28
ADCINB3: J107.P$1 J107.P$2 J107.P$3 L1.P$25
ADCINB4: J145.P$1 J145.P$2 J145.P$3 L1.P$68
ADCINB5: J148.P$1 J148.P$2 J148.P$3 L1.P$65
ADCINC2: J109.P$1 J109.P$2 J109.P$3 L1.P$27
ADCINC3: J106.P$1 J106.P$2 J106.P$3 L1.P$24
ADCINC4: J146.P$1 J146.P$2 J146.P$3 L1.P$67
ADCINC5: J149.P$1 J149.P$2 J149.P$3 L1.P$64
DAC1: J114.P$1 J114.P$2 J114.P$3 L1.P$32
DAC2: J113.P$1 J113.P$2 J113.P$3 L1.P$31
DAC3: J141.P$1 J141.P$2 J141.P$3 J252.P$1 J252.P$2 L1.P$72
DAC4: J142.P$1 J142.P$2 J142.P$3 J253.P$1 J253.P$2 L1.P$71
DACOUTA: J112.P$1 J112.P$2 J112.P$3 L1.P$30
DACOUTB: J143.P$1 J143.P$2 J143.P$3 L1.P$70
DRV1_DIR: J80.P$1 J80.P$2 U2.P$2
DRV1_M+: SV7.1 SV7.3 SV7.5 U2.P$8
DRV1_M-: SV7.2 SV7.4 SV7.6 U2.P$10
DRV1_PWM: J79.P$1 J79.P$2 U2.P$1
DRV2_DIR: J83.P$1 J83.P$2 U4.P$2
DRV2_M+: SV8.1 SV8.3 SV8.5 U4.P$8
DRV2_M-: SV8.2 SV8.4 SV8.6 U4.P$10
DRV2_PWM: J82.P$1 J82.P$2 U4.P$1
GND [supply]: B1.P$2 B2.P$2 C1.- C2.2 C3.2 C4.2 C5.2 C6.2 C7.- C8.2 C9.2 C10.2 C11.2 C12.- C13.- C14.2 C15.- C16.2 C20.- C22.2 C25.- C26.2 C27.- C28.- DCDC3.3V.2 DCDC5V.2 G1.- IC1.7 IC2.7 IC3.7 IC4.7 J5.2 J5.3 J9.P$1 J9.P$2 J64.P$1 J64.P$2 J102.P$1 J102.P$2 J102.P$3 J104.P$1 J104.P$2 J104.P$3 J124.P$1 J124.P$2 J124.P$3 J151.P$1 J151.P$2 J151.P$3 J153.P$1 J153.P$2 J153.P$3 JP2.2 JP3.2 L1.P$20 L1.P$22 L1.P$60 L1.P$62 LED_3.3V1.K LED_5V1.K M1.P$2 POWER.1 R3.1 R7.1 R25.1 R41.2 R43.2 S20.P$1 S20.P$2 S20.P$3 S20.P$4 S20.P$5 S20.P$6 S20.P$7 S20.P$8 S20.P$9 S20.P$10 S24.P$1 S24.P$2 S24.P$3 S24.P$4 S24.P$5 S24.P$6 S24.P$7 S24.P$8 S24.P$9 S24.P$10 S27.P$1 S27.P$2 S27.P$3 S27.P$4 S27.P$5 S27.P$6 S27.P$7 S27.P$8 S27.P$9 S27.P$10 S28.P$1 S28.P$2 S28.P$3 S28.P$4 S28.P$5 S28.P$6 S28.P$7 S28.P$8 S28.P$9 S28.P$10 S129.P$1 S129.P$2 S129.P$3 S129.P$4 S129.P$5 S137.P$1 S137.P$2 S137.P$3 S137.P$4 S137.P$5 S159.P$1 SV2.13 SV2.14 SV2.19 SV2.20 SV2.29 SV2.30 SV2.33 SV2.34 SV4.9 SV4.10 SV4.25 SV4.26 SV4.39 SV4.40 T1.3 T2.3 TRIMPOT1.5 TRIMPOT1.6 TRIMPOT2.5 TRIMPOT2.6 U1.4 U1.5 U1.11 U1.12 U1.13 U2.P$7 U2.P$9 U2.P$15 U2.P$16 U2.P$17 U3.4 U4.P$7 U4.P$9 U4.P$15 U4.P$16 U4.P$17 U5.4 U5.5 U5.11 U5.12 U5.13 U6.P$3 U6.P$6 U7.P$3 U7.P$6 U8.2 U8.4 U$1.2
GPIO0: J122.P$1 J122.P$2 J122.P$3 L1.P$40
GPIO1: J121.P$1 J121.P$2 J121.P$3 L1.P$39
GPIO2: J120.P$1 J120.P$2 J120.P$3 J198.P$1 J198.P$2 L1.P$38
GPIO3: J119.P$1 J119.P$2 J119.P$3 J199.P$1 J199.P$2 L1.P$37
GPIO4: J118.P$1 J118.P$2 J118.P$3 J238.P$1 J238.P$2 L1.P$36
GPIO5: J117.P$1 J117.P$2 J117.P$3 J239.P$1 J239.P$2 L1.P$35
GPIO6: J133.P$1 J133.P$2 J133.P$3 J240.P$1 J240.P$2 L1.P$80
GPIO7: J134.P$1 J134.P$2 J134.P$3 J242.P$1 J242.P$2 L1.P$79
GPIO8: J135.P$1 J135.P$2 J135.P$3 J243.P$1 J243.P$2 L1.P$78
GPIO9: J136.P$1 J136.P$2 J136.P$3 J244.P$1 J244.P$2 L1.P$77
GPIO10: J84.P$1 J84.P$2 J137.P$1 J137.P$2 J137.P$3 L1.P$76
GPIO11: J86.P$1 J86.P$2 J138.P$1 J138.P$2 J138.P$3 L1.P$75
GPIO14: J139.P$1 J139.P$2 J139.P$3 J201.P$1 J201.P$2 L1.P$74
GPIO15: J140.P$1 J140.P$2 J140.P$3 J202.P$1 J202.P$2 L1.P$73
GPIO16: J115.P$1 J115.P$2 J115.P$3 J251.P$1 J251.P$2 L1.P$33
GPIO18: J16.P$1 J16.P$2 J16.P$3 L1.P$4
GPIO19: J15.P$1 J15.P$2 J15.P$3 L1.P$3
GPIO22: J20.P$1 J20.P$2 J20.P$3 J210.P$1 J210.P$2 L1.P$8
GPIO24: J116.P$1 J116.P$2 J116.P$3 J245.P$1 J245.P$2 L1.P$34
GPIO25: J162.P$1 J162.P$2 J162.P$3 J246.P$1 J246.P$2 L1.P$51
GPIO26: J160.P$1 J160.P$2 J160.P$3 J247.P$1 J247.P$2 L1.P$53
GPIO27: J161.P$1 J161.P$2 J161.P$3 J248.P$1 J248.P$2 L1.P$52
GPIO29: J29.P$1 J29.P$2 J29.P$3 J85.P$1 J85.P$2 L1.P$11
GPIO32: J14.P$1 J14.P$2 J14.P$3 J87.P$1 J87.P$2 L1.P$2
GPIO40: J163.P$1 J163.P$2 J163.P$3 J208.P$1 J208.P$2 L1.P$50
GPIO41: J164.P$1 J164.P$2 J164.P$3 J209.P$1 J209.P$2 L1.P$49
GPIO52: J165.P$1 J165.P$2 J165.P$3 J211.P$1 J211.P$2 L1.P$48
GPIO56: J169.P$1 J169.P$2 J169.P$3 L1.P$44
GPIO58: J33.P$1 J33.P$2 J33.P$3 L1.P$15
GPIO59: J32.P$1 J32.P$2 J32.P$3 L1.P$14
GPIO60: J19.P$1 J19.P$2 J19.P$3 J249.P$1 J249.P$2 L1.P$7
GPIO61: J101.P$1 J101.P$2 J101.P$3 J250.P$1 J250.P$2 L1.P$19
GPIO63: J158.P$1 J158.P$2 J158.P$3 J204.P$1 J204.P$2 L1.P$55
GPIO64: J159.P$1 J159.P$2 J159.P$3 J205.P$1 J205.P$2 L1.P$54
GPIO65: J166.P$1 J166.P$2 J166.P$3 J206.P$1 J206.P$2 L1.P$47
GPIO66: J154.P$1 J154.P$2 J154.P$3 J207.P$1 J207.P$2 L1.P$59
GPIO67: J17.P$1 J17.P$2 J17.P$3 J232.P$1 J232.P$2 L1.P$5
GPIO94: J167.P$1 J167.P$2 J167.P$3 J233.P$1 J233.P$2 L1.P$46
GPIO95: J176.P$1 J176.P$2 J176.P$3 J241.P$1 J241.P$2 L1.P$42
GPIO97: J168.P$1 J168.P$2 J168.P$3 J234.P$1 J234.P$2 L1.P$45
GPIO104: J28.P$1 J28.P$2 J28.P$3 L1.P$10
GPIO105: J21.P$1 J21.P$2 J21.P$3 L1.P$9
GPIO111: J18.P$1 J18.P$2 J18.P$3 J235.P$1 J235.P$2 L1.P$6
GPIO122: J66.P$1 J66.P$2 J99.P$1 J99.P$2 J99.P$3 L1.P$17
GPIO123: J67.P$1 J67.P$2 J100.P$1 J100.P$2 J100.P$3 L1.P$18
GPIO124: J31.P$1 J31.P$2 J31.P$3 J68.P$1 J68.P$2 L1.P$13
GPIO125: J30.P$1 J30.P$2 J30.P$3 J69.P$1 J69.P$2 L1.P$12
GPIO130: J156.P$1 J156.P$2 J156.P$3 J236.P$1 J236.P$2 L1.P$57
GPIO131: J155.P$1 J155.P$2 J155.P$3 J237.P$1 J237.P$2 L1.P$58
GPIO139: J170.P$1 J170.P$2 J170.P$3 L1.P$43
MENABLE: S159.P$2 U1.8 U2.P$3 U4.P$3 U5.8
MIC_OUT: J49.P$1 J49.P$2 J49.P$3 U8.5
MOTOR1+ [supply]: SV3.1 SV3.3 SV3.5 U1.15
MOTOR1- [supply]: SV3.2 SV3.4 SV3.6 U1.10
MOTOR2+ [supply]: SV1.1 SV1.3 SV1.5 U5.15
MOTOR2- [supply]: SV1.2 SV1.4 SV1.6 U5.10
N$31: R2.2 T2.1
N$47: J62.P$1 J62.P$2 LED24.K
N$48: IC4.12 R40.1
N$49: SV4.1 SV4.2
N$50: B1.P$1 R40.2
N$51: Q1.1 U3.2
N$52: J63.P$1 J63.P$2
N$54: SV5.1 SV5.2
N$58: SV5.3 SV5.4
N$61: SV5.5 SV5.6
N$70: Q1.2 U3.1
N$71: SV4.3 SV4.4
N$72: SV4.5 SV4.6
N$73: SV4.7 SV4.8
N$74: SV5.7 SV5.8
N$75: SV4.11 SV4.12
N$76: SV4.13 SV4.14
N$77: SV4.15 SV4.16
N$78: SV4.17 SV4.18
N$79: SV4.19 SV4.20
N$80: SV4.21 SV4.22
N$87: R1.2 T1.1
N$88: S138.P$1 S138.P$2 S138.P$3 S138.P$4 S138.P$5
N$90: C21.- U8.8
N$91: R10.2 U8.1
N$92: C21.+ R10.1
N$93: C18.2 J7.P$1 J7.P$2
N$94: C18.1 M1.P$1 R9.2
N$104: R24.1 R25.2 U7.P$5
N$114: LED_5V1.A R26.1
N$117: LED_3.3V1.A R27.1
N$118: J1.P$1 J1.P$2 J1.P$3 U3.7
N$119: G1.+ U3.3
N$120: SV4.23 SV4.24
N$121: SV5.9 SV5.10
N$122: SV4.27 SV4.28
N$123: SV4.29 SV4.30
N$124: SV4.31 SV4.32
N$125: R6.1 U5.1
N$126: SV4.33 SV4.34
N$127: C2.1 R7.2 U5.3
N$128: SV4.35 SV4.36
N$129: R8.1 U1.1
N$130: C14.1 R3.2 U1.3
N$131: JP2.1 R4.1 U1.14
N$132: R18.1 S159.P$3
N$133: JP3.1 R5.1 U5.14
N$134: SV4.37 SV4.38
N$135: SV5.11 SV5.12
N$136: SV2.39 SV2.40
N$137: SV2.37 SV2.38
N$138: SV2.35 SV2.36
N$139: SV6.1 SV6.2
N$140: SV2.31 SV2.32
N$141: SV6.3 SV6.4
N$142: SV2.27 SV2.28
N$143: SV2.25 SV2.26
N$144: SV2.23 SV2.24
N$145: SV2.21 SV2.22
N$146: SV6.5 SV6.6
N$147: SV2.17 SV2.18
N$148: SV2.15 SV2.16
N$149: SV6.7 SV6.8
N$150: SV2.11 SV2.12
N$151: SV2.9 SV2.10
N$152: SV2.7 SV2.8
N$153: SV2.5 SV2.6
N$154: SV6.9 SV6.10
N$155: SV6.11 SV6.12
N$156: IC2.1 J26.P$1 J26.P$2
N$157: IC2.2 LED7.K
N$158: LED7.A R17.1
N$159: IC2.3 J11.P$1 J11.P$2
N$160: IC2.4 LED8.K
N$161: LED8.A R19.1
N$162: J70.P$1 J70.P$2
N$163: IC2.5 J12.P$1 J12.P$2
N$164: IC2.6 LED9.K
N$167: J71.P$1 J71.P$2
N$168: J72.P$1 J72.P$2
N$169: J73.P$1 J73.P$2
N$170: J74.P$1 J74.P$2
N$171: J75.P$1 J75.P$2
N$173: J76.P$1 J76.P$2
N$174: J77.P$1 J77.P$2
N$175: C19.1 U2.P$14
N$176: C19.2 U2.P$13
N$177: C17.1 U2.P$12
N$178: R43.1 U4.P$6
N$179: R41.1 U2.P$6
N$186: J78.P$1 J78.P$2 R42.2 U2.P$4
N$187: TRIMPOT1.3 TRIMPOT1.4 U2.P$5
N$188: C24.1 U4.P$14
N$189: C24.2 U4.P$13
N$190: C23.1 U4.P$12
N$191: J81.P$1 J81.P$2 R44.2 U4.P$4
N$192: TRIMPOT2.3 TRIMPOT2.4 U4.P$5
N$193: J88.P$2 J89.P$1 J89.P$2
N$194: J88.P$5 J90.P$1 J90.P$2
N$195: J88.P$1 J91.P$1 J91.P$2
N$196: J88.P$3 J92.P$1 J92.P$2
N$197: J88.P$4 J93.P$1 J93.P$2
N$248: S91.P$1 S91.P$2 S91.P$3 S91.P$4 S91.P$5
N$249: S92.P$1 S92.P$2 S92.P$3 S92.P$4 S92.P$5
N$250: S93.P$1 S93.P$2 S93.P$3 S93.P$4 S93.P$5
N$251: S94.P$1 S94.P$2 S94.P$3 S94.P$4 S94.P$5
N$252: S95.P$1 S95.P$2 S95.P$3 S95.P$4 S95.P$5
N$253: S96.P$1 S96.P$2 S96.P$3 S96.P$4 S96.P$5
N$254: S97.P$1 S97.P$2 S97.P$3 S97.P$4 S97.P$5
N$255: S98.P$1 S98.P$2 S98.P$3 S98.P$4 S98.P$5
N$256: S99.P$1 S99.P$2 S99.P$3 S99.P$4 S99.P$5
N$257: S101.P$1 S101.P$2 S101.P$3 S101.P$4 S101.P$5
N$258: S105.P$1 S105.P$2 S105.P$3 S105.P$4 S105.P$5
N$259: S108.P$1 S108.P$2 S108.P$3 S108.P$4 S108.P$5
N$260: S140.P$1 S140.P$2 S140.P$3 S140.P$4 S140.P$5
N$261: S160.P$1 S160.P$2 S160.P$3 S160.P$4 S160.P$5
N$262: S161.P$1 S161.P$2 S161.P$3 S161.P$4 S161.P$5
N$263: S162.P$1 S162.P$2 S162.P$3 S162.P$4 S162.P$5
N$264: S163.P$1 S163.P$2 S163.P$3 S163.P$4 S163.P$5
N$265: S164.P$1 S164.P$2 S164.P$3 S164.P$4 S164.P$5
N$266: S165.P$1 S165.P$2 S165.P$3 S165.P$4 S165.P$5
N$267: S166.P$1 S166.P$2 S166.P$3 S166.P$4 S166.P$5
N$268: S167.P$1 S167.P$2 S167.P$3 S167.P$4 S167.P$5
N$269: S168.P$1 S168.P$2 S168.P$3 S168.P$4 S168.P$5
N$270: S169.P$1 S169.P$2 S169.P$3 S169.P$4 S169.P$5
N$271: S170.P$1 S170.P$2 S170.P$3 S170.P$4 S170.P$5
N$272: S171.P$1 S171.P$2 S171.P$3 S171.P$4 S171.P$5
N$273: S172.P$1 S172.P$2 S172.P$3 S172.P$4 S172.P$5
N$274: S173.P$1 S173.P$2 S173.P$3 S173.P$4 S173.P$5
N$275: S174.P$1 S174.P$2 S174.P$3 S174.P$4 S174.P$5
N$276: S175.P$1 S175.P$2 S175.P$3 S175.P$4 S175.P$5
N$277: S176.P$1 S176.P$2 S176.P$3 S176.P$4 S176.P$5
N$278: S177.P$1 S177.P$2 S177.P$3 S177.P$4 S177.P$5
N$279: S178.P$1 S178.P$2 S178.P$3 S178.P$4 S178.P$5
N$280: S179.P$1 S179.P$2 S179.P$3 S179.P$4 S179.P$5
N$281: S180.P$1 S180.P$2 S180.P$3 S180.P$4 S180.P$5
N$282: S181.P$1 S181.P$2 S181.P$3 S181.P$4 S181.P$5
N$283: S182.P$1 S182.P$2 S182.P$3 S182.P$4 S182.P$5
N$284: S183.P$1 S183.P$2 S183.P$3 S183.P$4 S183.P$5
N$285: S184.P$1 S184.P$2 S184.P$3 S184.P$4 S184.P$5
N$286: S185.P$1 S185.P$2 S185.P$3 S185.P$4 S185.P$5
N$287: S186.P$1 S186.P$2 S186.P$3 S186.P$4 S186.P$5
N$288: S187.P$1 S187.P$2 S187.P$3 S187.P$4 S187.P$5
N$289: S188.P$1 S188.P$2 S188.P$3 S188.P$4 S188.P$5
N$290: S189.P$1 S189.P$2 S189.P$3 S189.P$4 S189.P$5
N$291: S190.P$1 S190.P$2 S190.P$3 S190.P$4 S190.P$5
N$292: S191.P$1 S191.P$2 S191.P$3 S191.P$4 S191.P$5
N$293: S192.P$1 S192.P$2 S192.P$3 S192.P$4 S192.P$5
N$294: S193.P$1 S193.P$2 S193.P$3 S193.P$4 S193.P$5
N$295: S194.P$1 S194.P$2 S194.P$3 S194.P$4 S194.P$5
N$296: S195.P$1 S195.P$2 S195.P$3 S195.P$4 S195.P$5
N$297: S196.P$1 S196.P$2 S196.P$3 S196.P$4 S196.P$5
N$298: S197.P$1 S197.P$2 S197.P$3 S197.P$4 S197.P$5
N$299: S198.P$1 S198.P$2 S198.P$3 S198.P$4 S198.P$5
N$300: S199.P$1 S199.P$2 S199.P$3 S199.P$4 S199.P$5
N$301: S200.P$1 S200.P$2 S200.P$3 S200.P$4 S200.P$5
N$302: S201.P$1 S201.P$2 S201.P$3 S201.P$4 S201.P$5
N$303: S202.P$1 S202.P$2 S202.P$3 S202.P$4 S202.P$5
N$304: S203.P$1 S203.P$2 S203.P$3 S203.P$4 S203.P$5
N$305: S204.P$1 S204.P$2 S204.P$3 S204.P$4 S204.P$5
N$306: S205.P$1 S205.P$2 S205.P$3 S205.P$4 S205.P$5
N$307: S206.P$1 S206.P$2 S206.P$3 S206.P$4 S206.P$5
N$308: S207.P$1 S207.P$2 S207.P$3 S207.P$4 S207.P$5
N$309: S208.P$1 S208.P$2 S208.P$3 S208.P$4 S208.P$5
N$310: S209.P$1 S209.P$2 S209.P$3 S209.P$4 S209.P$5
N$311: S210.P$1 S210.P$2 S210.P$3 S210.P$4 S210.P$5
N$312: S211.P$1 S211.P$2 S211.P$3 S211.P$4 S211.P$5
N$313: S212.P$1 S212.P$2 S212.P$3 S212.P$4 S212.P$5
N$314: S213.P$1 S213.P$2 S213.P$3 S213.P$4 S213.P$5
N$315: S214.P$1 S214.P$2 S214.P$3 S214.P$4 S214.P$5
N$316: S215.P$1 S215.P$2 S215.P$3 S215.P$4 S215.P$5
N$317: S216.P$1 S216.P$2 S216.P$3 S216.P$4 S216.P$5
N$318: S217.P$1 S217.P$2 S217.P$3 S217.P$4 S217.P$5
N$319: S218.P$1 S218.P$2 S218.P$3 S218.P$4 S218.P$5
N$320: S219.P$1 S219.P$2 S219.P$3 S219.P$4 S219.P$5
N$321: S220.P$1 S220.P$2 S220.P$3 S220.P$4 S220.P$5
N$322: S221.P$1 S221.P$2 S221.P$3 S221.P$4 S221.P$5
N$323: S222.P$1 S222.P$2 S222.P$3 S222.P$4 S222.P$5
N$324: S223.P$1 S223.P$2 S223.P$3 S223.P$4 S223.P$5
N$325: S224.P$1 S224.P$2 S224.P$3 S224.P$4 S224.P$5
N$326: S225.P$1 S225.P$2 S225.P$3 S225.P$4 S225.P$5
N$327: S226.P$1 S226.P$2 S226.P$3 S226.P$4 S226.P$5
N$335: J125.P$1 J125.P$2 J125.P$3 U$1.3
N$336: J126.P$1 J126.P$2 J126.P$3 U$1.4
N$337: J127.P$1 J127.P$2 J127.P$3 U$1.5
N$338: J128.P$1 J128.P$2 J128.P$3 U$1.6
N$339: J129.P$1 J129.P$2 J129.P$3 U$1.7
N$340: J130.P$1 J130.P$2 J130.P$3 U$1.8
N$341: J131.P$1 J131.P$2 J131.P$3 U$1.9
N$342: J132.P$1 J132.P$2 J132.P$3 U$1.10
N$343: IC1.1 J178.P$1 J178.P$2
N$344: IC1.2 LED1.K
N$345: LED1.A R11.1
N$346: IC1.3 J179.P$1 J179.P$2
N$347: IC1.4 LED2.K
N$348: LED2.A R12.1
N$349: IC1.5 J180.P$1 J180.P$2
N$350: IC1.6 LED3.K
N$351: LED3.A R13.1
N$352: IC1.9 J182.P$1 J182.P$2
N$353: IC1.8 LED4.K
N$354: LED4.A R14.1
N$355: IC1.11 J183.P$1 J183.P$2
N$356: IC1.10 LED5.K
N$357: LED5.A R15.1
N$358: IC1.13 J184.P$1 J184.P$2
N$359: IC1.12 LED6.K
N$360: LED6.A R16.1
N$361: LED9.A R20.1
N$362: IC2.9 J13.P$1 J13.P$2
N$363: IC2.8 LED10.K
N$364: LED10.A R21.1
N$365: IC2.11 J22.P$1 J22.P$2
N$366: IC2.10 LED11.K
N$367: LED11.A R22.1
N$368: IC2.13 J25.P$1 J25.P$2
N$369: IC2.12 LED12.K
N$370: LED12.A R23.1
N$371: IC3.1 J189.P$1 J189.P$2
N$372: IC3.2 LED13.K
N$373: LED13.A R28.1
N$374: IC3.3 J27.P$1 J27.P$2
N$375: IC3.4 LED14.K
N$376: LED14.A R29.1
N$377: IC3.5 J34.P$1 J34.P$2
N$378: IC3.6 LED15.K
N$379: LED15.A R30.1
N$380: IC3.9 J186.P$1 J186.P$2
N$381: IC3.8 LED16.K
N$382: LED16.A R31.1
N$383: IC3.11 J187.P$1 J187.P$2
N$384: IC3.10 LED17.K
N$385: LED17.A R32.1
N$386: IC3.13 J188.P$1 J188.P$2
N$387: IC3.12 LED18.K
N$388: LED18.A R33.1
N$389: IC4.1 J195.P$1 J195.P$2
N$390: IC4.2 LED19.K
N$391: LED19.A R34.1
N$392: IC4.3 J190.P$1 J190.P$2
N$393: IC4.4 LED20.K
N$394: LED20.A R35.1
N$395: IC4.5 J191.P$1 J191.P$2
N$396: IC4.6 LED21.K
N$397: LED21.A R36.1
N$398: IC4.9 J192.P$1 J192.P$2
N$399: IC4.8 LED22.K
N$400: LED22.A R37.1
N$401: IC4.11 J193.P$1 J193.P$2
N$402: IC4.10 LED23.K
N$403: LED23.A R38.1
N$404: IC4.13 J194.P$1 J194.P$2
N$406: LED24.A R39.1
N$407: S130.P$1 S130.P$2 S130.P$3 S130.P$4 S130.P$5
N$408: J8.P$1 J8.P$2 U8.3
N$414: J196.P$1 J196.P$2 U1.7
N$425: J197.P$1 J197.P$2 U5.7
POWER [supply]: B2.P$1 C1.+ C3.1 C5.1 C12.+ C13.+ C15.+ C16.1 C17.2 C20.+ C22.1 C23.2 C25.+ C27.+ C28.+ DCDC3.3V.1 DCDC5V.1 J5.1 POWER.2 S141.P$1 S141.P$2 S141.P$3 S141.P$4 S141.P$5 U1.9 U1.16 U2.P$11 U4.P$11 U5.9 U5.16 U6.P$1 U6.P$2 U7.P$1 U7.P$2
RCPWR: S139.P$1 S139.P$2 S139.P$3 S139.P$4 S139.P$5 S147.P$1 S147.P$2 S147.P$3 S147.P$4 S147.P$5
RESET: J98.P$1 J98.P$2 J98.P$3 L1.P$16
RESET_2: J157.P$1 J157.P$2 J157.P$3 L1.P$56
SCL: J2.P$1 J2.P$2 J2.P$3 U3.6
SDA: J3.P$1 J3.P$2 J3.P$3 U3.5
TR_BASE: J6.P$1 J6.P$2 J6.P$3 R1.1
TR_BASE1: J24.P$1 J24.P$2 J24.P$3 R2.1
TR_LOAD: J4.P$1 J4.P$2 J4.P$3 T1.2
TR_LOAD1: J23.P$1 J23.P$2 J23.P$3 T2.2
V_REG [supply]: C4.1 DCDC3.3V.3 JP1.1 U6.P$4 U6.P$5
VCC [supply]: C6.1 C7.+ C9.1 C10.1 C11.1 C26.1 IC1.14 IC2.14 IC3.14 IC4.14 J10.P$1 J10.P$2 J10.P$3 J65.P$1 J65.P$2 J123.P$1 J123.P$2 J123.P$3 J177.P$1 J177.P$2 J177.P$3 JP1.2 L1.P$1 L1.P$41 R4.2 R5.2 R6.2 R8.2 R9.1 R11.2 R12.2 R13.2 R14.2 R15.2 R16.2 R17.2 R18.2 R19.2 R20.2 R21.2 R22.2 R23.2 R27.2 R28.2 R29.2 R30.2 R31.2 R32.2 R33.2 R34.2 R35.2 R36.2 R37.2 R38.2 R39.2 R42.1 R44.1 S42.P$1 S42.P$2 S42.P$3 S42.P$4 S42.P$5 S42.P$6 S42.P$7 S42.P$8 S42.P$9 S42.P$10 S50.P$1 S50.P$2 S50.P$3 S50.P$4 S50.P$5 S50.P$6 S50.P$7 S50.P$8 S50.P$9 S50.P$10 S53.P$1 S53.P$2 S53.P$3 S53.P$4 S53.P$5 S53.P$6 S53.P$7 S53.P$8 S53.P$9 S53.P$10 S58.P$1 S58.P$2 S58.P$3 S58.P$4 S58.P$5 S58.P$6 S58.P$7 S58.P$8 S58.P$9 S58.P$10 TRIMPOT1.1 TRIMPOT1.2 TRIMPOT2.1 TRIMPOT2.2 U1.2 U1.6 U3.8 U5.2 U5.6 U8.6 U$1.1

## Tracks (layer width: path | path; a pad name or v marks a point on that pad's centre or on a via)
+5V
  Top 0.61: L1.P$61 49.58,102.31 52.02,102.31 J152.P$1 52.32,102.31 54.56,102.31 J152.P$2 54.86,102.31 57.1,102.31 J152.P$3 56.79,102.51 56.79,140.72 58.42,142.34 58.42,164.39 57.3,165.51 J103.P$3 57.1,165.81 54.86,165.81 J103.P$2 54.56,165.81 52.32,165.81 J103.P$1 52.02,165.81 49.58,165.81 L1.P$21 | 11.48,119.48 11.48,118.16 C8.1 | 11.48,119.48 14.43,122.43 R24.2 14.73,122.33 15.04,122.02 17.48,122.02 R26.2 17.58,122.33 17.58,126.09 S18.P$1 | U7.P$4 8.13,123.14 8.13,121.41 9.86,119.69 11.28,119.69 11.48,119.48 | SV2.4 3.15,53.95 3.15,51.51 SV2.2 3.45,51.51 5.69,51.51 SV2.1 5.69,51.82 5.69,53.95 SV2.3 | J200.P$1 J200.P$2 16.66,159.82 16.66,154.13 17.78,153.01 17.78,151.18 16.66,150.06 J203.P$2 J203.P$1 | S18.P$1 17.58,126.39 17.58,128.83 S18.P$2 17.58,129.13 17.58,131.37 S18.P$3 | S18.P$1 17.88,126.39 20.12,126.39 S17.P$1 20.12,126.69 20.12,128.83 S17.P$2 | S18.P$3 17.88,131.47 20.12,131.47 S17.P$3 20.12,131.78 20.12,133.91 S17.P$4 | S18.P$3 17.58,131.67 17.58,133.91 S18.P$4 17.58,134.21 17.58,136.45 S18.P$5 17.88,136.55 20.12,136.55 S17.P$5
  Bottom 0.61: 13.82,140.31 9.55,140.31 DCDC5V.3 | 13.82,140.31 17.58,136.55 S18.P$5 | J203.P$1 14.02,149.86 14.02,140.51 13.82,140.31 | SV2.4 3.15,54.05 3.15,54.66 1.83,55.98 1.83,100.18 6.2,104.55 10.16,104.55 16.97,111.35 16.97,125.68 17.58,126.29 S18.P$1 | L1.P$21 49.48,165.81 49.17,165.81 46.33,168.66 15.65,168.66 12.7,165.71 12.7,161.24 13.92,160.02 J200.P$1
ADCIN14
  Top 0.203: L1.P$23 49.58,160.73 52.02,160.73 J105.P$1 52.12,160.73 54.56,160.73 J105.P$2 54.66,160.73 57.1,160.73 J105.P$3
ADCIN15
  Top 0.203: L1.P$63 49.58,97.23 52.02,97.23 J150.P$1 52.12,97.23 54.56,97.23 J150.P$2 54.66,97.23 57.1,97.23 J150.P$3
ADCINA2
  Top 0.203: L1.P$29 49.58,145.49 52.02,145.49 J111.P$1 52.12,145.49 54.56,145.49 J111.P$2 54.66,145.49 57.1,145.49 J111.P$3
ADCINA3
  Top 0.203: L1.P$26 49.58,153.11 52.02,153.11 J108.P$1 52.12,153.11 54.56,153.11 J108.P$2 54.66,153.11 57.1,153.11 J108.P$3
ADCINA4
  Top 0.203: L1.P$69 49.58,81.99 52.02,81.99 J144.P$1 52.12,81.99 54.56,81.99 J144.P$2 54.66,81.99 57.1,81.99 J144.P$3
ADCINA5
  Top 0.203: L1.P$66 49.58,89.61 52.02,89.61 J147.P$1 52.12,89.61 54.56,89.61 J147.P$2 54.66,89.61 57.1,89.61 J147.P$3
ADCINB2
  Top 0.203: L1.P$28 49.58,148.03 52.02,148.03 J110.P$1 52.12,148.03 54.56,148.03 J110.P$2 54.66,148.03 57.1,148.03 J110.P$3
ADCINB3
  Top 0.203: L1.P$25 49.58,155.65 52.02,155.65 J107.P$1 52.12,155.65 54.56,155.65 J107.P$2 54.66,155.65 57.1,155.65 J107.P$3
ADCINB4
  Top 0.203: L1.P$68 49.58,84.53 52.02,84.53 J145.P$1 52.12,84.53 54.56,84.53 J145.P$2 54.66,84.53 57.1,84.53 J145.P$3
ADCINB5
  Top 0.203: L1.P$65 49.58,92.15 52.02,92.15 J148.P$1 52.12,92.15 54.56,92.15 J148.P$2 54.66,92.15 57.1,92.15 J148.P$3
ADCINC2
  Top 0.203: L1.P$27 49.58,150.57 52.02,150.57 J109.P$1 52.12,150.57 54.56,150.57 J109.P$2 54.66,150.57 57.1,150.57 J109.P$3
ADCINC3
  Top 0.203: L1.P$24 49.58,158.19 52.02,158.19 J106.P$1 52.12,158.19 54.56,158.19 J106.P$2 54.66,158.19 57.1,158.19 J106.P$3
ADCINC4
  Top 0.203: L1.P$67 49.58,87.07 52.02,87.07 J146.P$1 52.12,87.07 54.56,87.07 J146.P$2 54.66,87.07 57.1,87.07 J146.P$3
ADCINC5
  Top 0.203: L1.P$64 49.58,94.69 52.02,94.69 J149.P$1 52.12,94.69 54.56,94.69 J149.P$2 54.66,94.69 57.1,94.69 J149.P$3
DAC1
  Top 0.203: J114.P$1 82.6,145.49 85.04,145.49 J114.P$2 85.14,145.49 87.58,145.49 J114.P$3 87.68,145.49 90.12,145.49 L1.P$32
DAC2
  Top 0.203: J113.P$1 82.6,142.95 85.04,142.95 J113.P$2 85.14,142.95 87.58,142.95 J113.P$3 87.68,142.95 90.12,142.95 L1.P$31
DAC3
  Top 0.203: J252.P$1 62.89,113.08 65.33,113.08 J252.P$2 65.43,112.98 65.43,112.06 66.85,110.64 66.85,97.84 82.6,82.09 J141.P$1 82.6,81.99 85.04,81.99 J141.P$2 85.14,81.99 87.58,81.99 J141.P$3 87.68,81.99 90.12,81.99 L1.P$72
DAC4
  Top 0.203: J253.P$1 62.89,110.54 65.33,110.54 J253.P$2 | J142.P$1 82.6,79.45 85.04,79.45 J142.P$2 85.14,79.45 87.58,79.45 J142.P$3 87.68,79.45 90.12,79.45 L1.P$71
  Bottom 0.203: J253.P$2 65.43,110.44 65.43,109.53 66.85,108.1 66.85,95.1 82.5,79.45 J142.P$1
DACOUTA
  Top 0.203: L1.P$30 49.58,142.95 52.02,142.95 J112.P$1 52.12,142.95 54.56,142.95 J112.P$2 54.66,142.95 57.1,142.95 J112.P$3
DACOUTB
  Top 0.203: L1.P$70 49.58,79.45 52.02,79.45 J143.P$1 52.12,79.45 54.56,79.45 J143.P$2 54.66,79.45 57.1,79.45 J143.P$3
DRV1_DIR
  Top 0.203: U2.P$2 95.91,10.57 95.91,9.25 95.61,8.94 92.56,8.94 89.61,11.89 85.45,11.89 84.23,13.11 84.23,28.04 86.77,30.58 J80.P$1 86.87,30.68 89.31,30.68 J80.P$2
DRV1_M+
  Top 0.356: U2.P$8 99.91,9.31 100.33,9.53
  Top 0.762: 100.33,9.53 100.33,9.68
  Top 1.016: 100.33,9.68 109.38,9.68 SV7.1 SV7.3 SV7.5
DRV1_M-
  Top 0.356: U2.P$10 99.26,19.25 99.54,19.53
  Top 1.016: 99.54,19.53 102.55,19.37 105.41,16.51 SV7.6 SV7.4 SV7.2
DRV1_PWM  (via drill 0.51)
  Top 0.203: v94.49,11.48 95.3,10.67 U2.P$1 | J79.P$1 86.87,33.22 89.31,33.22 J79.P$2
  Bottom 0.203: v94.49,11.48 94.49,17.37 107.19,30.07 107.19,30.89 106.17,31.9 90.63,31.9 89.41,33.12 J79.P$2
DRV2_DIR  (via drill 0.51)
  Top 0.203: v62.38,9.55 62.99,8.94 63.6,8.94 63.91,9.25 63.91,10.57 U4.P$2 | v79.65,17.07 66.14,30.58 65.94,30.58 J83.P$2 65.84,30.68 63.4,30.68 J83.P$1
  Bottom 0.203: v62.38,9.55 62.38,14.12 65.84,17.58 79.15,17.58 v79.65,17.07
DRV2_M+
  Top 0.356: U4.P$8 67.84,9.47 68.26,9.37
  Top 1.016: 68.26,9.37 77.47,9.37 77.47,11.27 SV8.1 SV8.3 SV8.5
DRV2_M-
  Top 0.356: U4.P$10 67.19,19.09 67.63,19.53
  Top 1.016: 67.63,19.53 71.75,19.53 SV8.6 SV8.4 SV8.2
DRV2_PWM  (via drill 0.51)
  Top 0.203: v61.57,11.48 62.38,10.67 63.2,10.67 U4.P$1 | v57.1,17.07 56.39,17.07 53.44,20.02 53.44,21.74 62.18,30.48 62.18,32 63.3,33.12 J82.P$1 63.4,33.22 65.84,33.22 J82.P$2
  Bottom 0.203: v61.57,11.48 61.57,12.6 v57.1,17.07
GND  (via drill 0.51)
  Top 0.356: U2.P$16 95.36,13.97 U2.P$17 | U2.P$15 96.01,13.97 U2.P$17 | U2.P$9 99.91,13.97 U2.P$17 | U2.P$7 99.26,13.97 U2.P$17 | U4.P$16 63.29,14.18 63.5,13.97 | U4.P$15 63.94,14.17 64.14,13.97 | U4.P$9 67.84,14.08 67.94,13.97 | U4.P$7 67.19,13.93 67.15,13.97
  Top 0.61: U5.5 43.69,57.3 44.91,57.3 U5.4 | R7.1 43.59,62.79 43.59,60.35 C2.2 43.79,60.15 43.79,57.61 U5.5 | U5.11 42.47,48.16 43.59,48.16 U5.12 43.89,48.16 44.91,48.16 U5.13 | 39.32,52.02 38,52.02 JP3.2 | 39.32,52.02 42.47,48.87 42.47,48.46 U5.11 | C1.- 42.27,39.42 42.27,43.79 42.16,43.89 42.16,47.95 U5.11 | 39.32,52.02 43.59,56.29 43.59,57 U5.5 | 27.74,57.3 28.35,57.3 U1.4 | 27.74,57.3 27.23,57.3 U1.5 27.03,57 27.03,56.19 22.86,52.02 | 27.74,57.3 27.74,60.05 C14.2 27.64,60.35 27.64,62.79 R3.1 27.43,62.99 27.23,62.99 22.15,68.07 22.15,71.22 22.35,71.42 22.35,72.85 21.03,74.17 C7.- 20.93,74.47 20.93,83.41 20.32,84.02 | SV4.10 8.33,61.67 10.77,61.67 SV4.9 | U1.13 28.35,48.16 27.43,48.16 U1.12 27.13,48.16 25.91,48.16 U1.11 25.91,48.46 25.91,48.97 23.98,50.9 | 22.86,52.02 21.44,52.02 JP2.2 | 23.98,50.9 22.86,52.02 | 23.98,50.9 22.45,49.38 22.45,45.82 25.7,42.57 25.7,39.42 C13.- | U8.2 27.33,85.95 30.48,89.1 J9.P$2 30.48,89.41 30.48,91.54 J9.P$1 | SV4.26 8.33,81.99 10.77,81.99 SV4.25 11.07,81.99 16.97,81.99 18.8,83.82 C26.2 19.1,84.02 20.32,84.02 | 20.32,84.02 22.15,85.85 U8.4 | U6.P$6 26.72,111.76 26.72,101.8 20.42,95.5 M1.P$2 20.12,95.61 19.91,95.61 15.85,99.67 11.07,99.67 SV4.39 10.77,99.77 8.33,99.77 SV4.40 8.13,99.97 8.13,104.34 7.01,105.46 | L1.P$22 49.58,163.27 52.02,163.27 J104.P$1 52.32,163.27 54.56,163.27 J104.P$2 54.86,163.27 57.1,163.27 J104.P$3 | 13.51,175.16 12.39,176.28 12.39,177.09 U3.4 | 13.51,175.16 28.35,175.16 29.36,176.17 G1.- | SV2.30 3.25,87.07 5.69,87.07 SV2.29 | SV2.34 3.25,92.15 5.69,92.15 SV2.33 | SV2.30 3.05,87.27 3.05,87.78 1.83,89 1.83,90.63 3.05,91.85 SV2.34